# EAGLE board VF_4Channel_ResistanceMixer_PANEL (EAGLE 9.6.2)
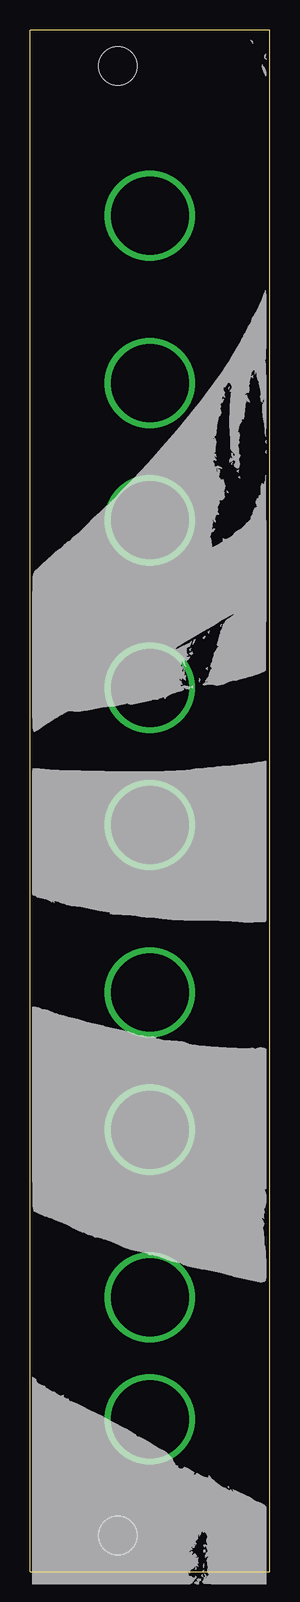
[diagram p0: board, top side]

Size 20 x 128.5 mm. Coordinates in mm from the lower left corner, seen from the top.
Copper layers (1*16): Top 0.035mm / dielectric 1.5mm / Bottom 0.035mm
Design rules "default": minimum track width 6mil, minimum drill 0.35mm, track to track 6mil, track to pad 6mil, pad to pad 6mil, via to via 6mil, smd to smd 6mil, copper to edge 40mil, drill to drill 6mil, minimum pad ring 10mil, minimum via ring 8mil, stop-mask expansion 4mil, vias tented up to drill 0mil, thermal gap 10mil
Net classes: 1 power: width 0.61 mm

## Footprints (pad centres in the part's own frame; a part is rotated, then mirrored left to right if it is on the bottom)
EURO_PANEL_4HP = hole 3.2: 7.5,125.5; 7.5,3

## Placement (x,y rotation side)
U$1  [EURO_PANEL_4HP]  -0.16,0 0 top

## Library data of the parts
U$1 = eurohelper

## Tracks (layer width: path | path; a pad name or v marks a point on that pad's centre or on a via)
N$1  (via drill 6.5)
  other vias: 10,113.03
N$8  (via drill 6.5)
  other vias: 10,87.63
N$10  (via drill 6.5)
  other vias: 10,62.23
N$12  (via drill 6.5)
  other vias: 10,36.83
N$13  (via drill 6.5)
  other vias: 10,99.06
N$14  (via drill 6.5)
  other vias: 10,73.66
N$15  (via drill 6.5)
  other vias: 10,48.26
N$16  (via drill 6.5)
  other vias: 10,22.86
N$18  (via drill 6.5)
  other vias: 10,12.7